# Altium PCB PCB1.PcbDoc (part 2 of 2)
Units mm, origin at the board's own origin, x right, y up, seen from the top; angles counter-clockwise.
Board outline 60.46 x 18.59 mm, 2 copper layers (Top Layer, Bottom Layer), stack 0.325 mm thick; 73 components, 89 nets, 327 pads, 208 vias.
Unrouted connection lines stored in the file: 2.
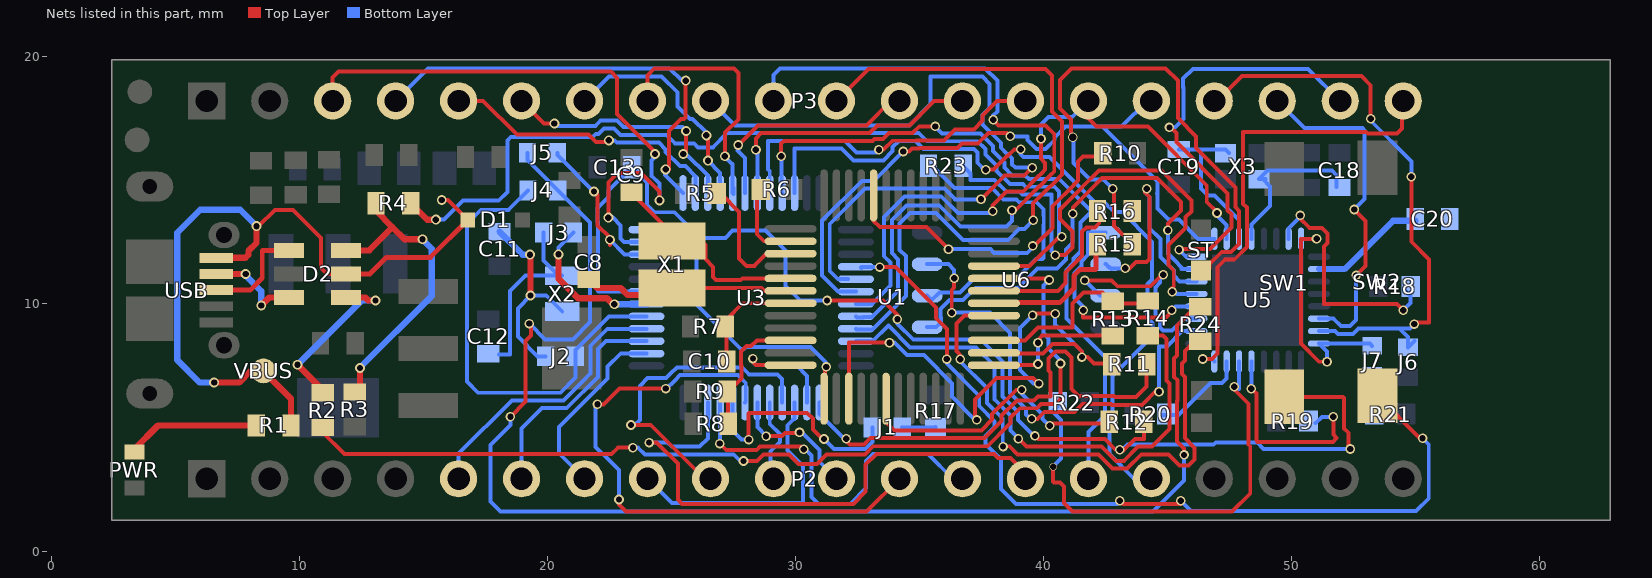
[diagram p2: the nets of this part, all layers, seen from the top]

## Via types
v1: diameter 0.385, hole 0.254, Top Layer to Bottom Layer, 122 vias
v2: diameter 0.4, hole 0.254, Top Layer to Bottom Layer, 75 vias
v3: diameter 0.5, hole 0.2, Top Layer to Bottom Layer, 9 vias
v4: diameter 0.385, hole 0.3, Top Layer to Bottom Layer, 1 vias
v5: diameter 0.3, hole 0.254, Top Layer to Bottom Layer, 1 vias

## Nets (pads, with @x,y where several pads share a name; then routed paths per layer and width w, separated by ;. In a path a pad name is that pad's centre, name@x,y a point inside that pad or via, vN(x,y) a via of type N, cw(c..) or ccw(c..) an arc to the next point about the centre after c; other vN are vias at no path point) (continued)
"LED STLINK": R15.2 U1.30 | length 5.7
  Top Layer w0.2: U1.30@38,10.03 38.025,10.055 40.654,10.055 41.225,10.626 41.225,11.134 41.486,11.395 42.106,11.395 42.112,11.401 42.112,12.002 R15.2@42.22,12.11
LNA: C20.2
MCO: J4.1 J5.1 R24.1 | length 55.2
  Top Layer w0.16: v1(18.5,5.45) 19.11,6.06 19.11,8.5 19.33,8.72 19.33,9.14 v1(19.26,9.21) ; v1(45.67,3.91) 45.67,4.18 45.388,4.462 45.388,6.096 45.397,6.105 45.397,6.925 45.273,7.049 45.273,7.8 45.388,7.915 45.388,9.128 46.15,9.89 R24.1@46.33,9.89
  Bottom Layer w0.16: v1(18.5,5.45) 18.5,5.12 17.69,4.31 17.69,2.03 18.091,1.629 44.418,1.629 45.67,2.881 v1(45.67,3.91) ; J5.1@19.19,16.1 19.19,15.8 J4.1@20.41,14.58 20.418,14.58 21.706,13.292 21.706,13.172 21.718,13.159 21.718,9.272 21.016,8.57 19.9,8.57 v1(19.26,9.21)
NetC8_2: C8.2 U1.6 X1.1 | length 8.6
  Top Layer w0.16: X1.1@25.39,10.65 28.628,10.65 28.748,10.53 U1.6@29.8,10.53
  Top Layer w0.254: C8.2@21.66,10.99 22.009,10.641 22.839,10.641 22.844,10.646 22.946,10.646 23.232,10.36 25.1,10.36 X1.1@25.39,10.65
NetC9_2: C9.2 U1.5 X1.2 | length 8.5
  Top Layer w0.16: C9.2@23.38,14.51 23.38,14.478 25.09,12.768 X1.2@25.09,12.54 ; X1.2@25.295,12.55 26.212,12.55 26.374,12.388 26.36,12.374 26.36,11.812 26.672,11.5 26.672,11.088 26.798,10.962 27.79,10.962 27.858,11.03 U1.5@29.8,11.03
NetC11_2: C11.2 J2.1 X2.1 | length 8.2
  Top Layer w0.254: v2(19.29,11.99) 19.31,12.01 v2(19.31,10.34)
  Bottom Layer w0.16: J2.1@19.92,7.89 19.6,7.89 18.796,8.694 18.796,9.826 v2(19.31,10.34) 19.945,10.34 X2.1@20.59,9.695
  Bottom Layer w0.254: C11.2@18.06,12.92 18.99,11.99 v2(19.29,11.99)
NetC12_2: C12.2 J3.1 X2.2 | length 7.4
  Bottom Layer w0.16: C12.2@18.04,7.96 18.484,7.96 18.484,10.524 19.105,11.145 X2.2@20.445,11.145 ; J3.1@19.84,12.88 19.84,11.75 X2.2@20.445,11.145 ; X2.2@20.59,11.145 X2.2@20.445,11.145
NetC13_2: C13.2 R12.2 SW1.1 U3.7 | length 51
  Top Layer w0.16: v1(31.27,10.14) 33.524,10.14 34.11,9.554 v1(34.11,9.39) ; v1(39.655,4.676) 39.775,4.556 42.475,4.556 42.911,4.12 v1(43.08,4.12) 43.189,4.12 43.219,4.09 43.691,4.562 44.05,4.562 R12.2@44.05,5.41 ; SW1.1@49.68,6.245 52.085,6.245 52.126,6.204 52.126,4.98 52.3,4.806 52.3,4.22 v1(52.37,4.15)
  Bottom Layer w0.16: U3.7@23.985,10.5 22.06,10.5 22.03,10.53 22.03,13.288 22.018,13.301 22.018,13.868 22.46,14.31 22.46,14.58 C13.2@23.4,15.52 24.011,14.909 24.011,14 24.311,13.7 25.12,13.7 26.16,12.66 27.167,12.66 27.464,12.957 28.794,12.957 29.602,12.149 29.602,10.728 30.19,10.14 v1(31.27,10.14) ; v1(34.11,9.39) 34.11,9.198 34.75,8.558 37.472,8.558 38.346,7.684 38.346,6.272 38.981,5.637 38.981,5.318 39.623,4.676 v1(39.655,4.676) ; v1(43.08,4.12) 43.104,4.12 43.134,4.09 43.379,4.335 45.846,4.335 45.851,4.33 46.859,4.33 46.951,4.422 48.607,4.422 48.879,4.15 v1(52.37,4.15)
NetC18_2: C18.2 U5.28 X3.1 | length 6.9
  Bottom Layer w0.16: U5.28@48.39,12.63 48.39,13.2 49.14,13.95 49.14,14.74 X3.1@48.845,15.035 ; X3.1@48.835,15.045 X3.1@48.845,15.035 ; X3.1@48.955,15.035 X3.1@48.845,15.035 ; C18.2@51.81,14.72 51.81,15.2 51.63,15.38 49.04,15.38 X3.1@48.695,15.035 X3.1@48.845,15.035
NetC19_2: C19.2 U5.27 X3.3 | length 6.5
  Bottom Layer w0.16: C19.2@45.46,16.23 46.345,16.23 ; X3.3@47.485,16.095 47.35,16.23 46.345,16.23 ; U5.27@47.89,12.63 47.89,13.388 46.898,14.38 46.63,14.38 46.345,14.665 46.345,16.23
NetC20_1: C20.1 U5.2 | length 4.7
  Bottom Layer w0.25: U5.2@51.115,11.405 52.144,11.405 54.099,13.36 C20.1@55,13.36
NetD1_2: D1.2 D2.5 R1.1 USB.1 VBUS.1 | length 31.2
  Top Layer w0.16: v2(8.26,13.14) 8.34,13.14 8.995,13.795 9.725,13.795 10.86,12.66 10.86,11.46 11.11,11.21 D2.5@11.87,11.21 ; v2(15.73,14.19) 15.98,14.19 D1.2@16.78,13.39
  Top Layer w0.2: D2.5@11.87,11.21 12.83,11.21 13.5,11.88 15.27,11.88 D1.2@16.78,13.39
  Top Layer w0.254: v2(6.55,6.83) 7.55,6.83 8.02,7.3 VBUS.1@8.54,7.3 8.54,7.29 9.65,6.18 R1.1@9.65,5.1 ; USB.1@6.625,11.86 7.81,11.86 7.931,11.981 7.931,12.137 8.26,12.466 v2(8.26,13.14)
  Bottom Layer w0.254: v2(6.55,6.83) 5.97,6.83 5.06,7.74 5.06,12.87 5.99,13.8 7.6,13.8 v2(8.26,13.14)
NetD2_1: D2.1 USB.3 | length 4.3
  Top Layer w0.2: USB.3@6.625,10.56 8,10.56 8.49,11.05 8.49,12.16 D2.1@9.57,12.16
NetD2_3: D2.3 USB.2 | length 4
  Top Layer w0.254: USB.2@6.625,11.21 v2(7.82,11.21) ; v2(8.45,9.94) 8.77,10.26 D2.3@9.57,10.26
  Bottom Layer w0.254: v2(7.82,11.21) 7.82,11.15 8.45,10.52 v2(8.45,9.94)
NetD2_4: D2.4 R2.1 | length 7
  Top Layer w0.254: v2(9.91,7.55) 10.93,6.53 R2.1@10.93,6.42 ; D2.4@11.87,10.26 12.65,10.26 12.77,10.14 v2(13.06,10.14)
  Bottom Layer w0.254: v2(9.91,7.55) 12.5,10.14 v2(13.06,10.14)
NetD2_6: D2.6 R3.1 R4.1 | length 12.5
  Top Layer w0.254: D2.6@11.87,12.16 12.8,12.16 13.739,13.099 ; R3.1@12.22,6.45 12.43,6.66 v2(12.43,7.42) ; R4.1@13.08,14.06 13.08,13.758 13.739,13.099 ; v2(14.95,12.61) 14.228,12.61 13.739,13.099
  Bottom Layer w0.254: v2(12.43,7.42) 15.33,10.32 15.33,12.23 v2(14.95,12.61)
NetJ1_1: J1.1 U3.44 | length 9.7
  Top Layer w0.16: v1(28.11,4.53) 28.11,5.59 28.13,5.61 30.47,5.61 30.7,5.38 30.7,4.93 31.08,4.55 v2(31.15,4.55)
  Bottom Layer w0.16: U3.44@27.46,6.025 27.46,4.89 27.82,4.53 v1(28.11,4.53) ; v2@31.048,4.59 31.088,4.55 v2(31.15,4.55) 31.555,4.145 32.815,4.145 33.1,4.43 J1.1@33.1,5.02
NetJ1_2: J1.2 R17.1 | length 1.4
  Bottom Layer w0.16: J1.2@34.3,5.02 35.64,5.02 R17.1@35.65,5.03
NetJ2_2: J2.2 J4.2 U3.5 | length 18.7
  Bottom Layer w0.16: J4.2@19.21,14.58 18.43,13.8 17.32,13.8 16.74,13.22 16.74,6.87 17.19,6.42 20.513,6.42 21.12,7.027 J2.2@21.12,7.89 21.12,8.15 22.47,9.5 U3.5@23.985,9.5
NetJ3_2: J3.2 U3.6 | length 6.1
  Top Layer w0.254: v2(20.44,12) 20.44,11.015 21.226,10.229 22.396,10.229 22.635,9.99 v2(22.69,9.99)
  Bottom Layer w0.16: v2(20.44,12) 20.44,12.28 J3.2@21.04,12.88
  Bottom Layer w0.254: v2(22.69,9.99) 23.975,9.99 U3.6@23.985,10
NetJ5_2: J5.2 U3.10 | length 6.3
  Top Layer w0.16: v2(21.87,14.54) 22.019,14.391 22.019,13.661 22.018,13.659 22.018,13.174 22.51,12.681 v2(22.51,12.59) 22.51,12.388 22.52,12.378
  Bottom Layer w0.16: J5.2@20.39,16.1 20.39,16.002 21.852,14.54 v2(21.87,14.54) ; v2(22.51,12.59) 23.1,12 U3.10@23.985,12
NetJ6_2: J6.2 P3.17 U5.7 | length 23.9
  Top Layer w0.16: P3.17@46.89,17.67 P3.17@46.89,18.19 47,18.19 47.999,19.189 52.821,19.189 53.2,18.81 v1(53.2,17.47) ; v1(54.84,15.13) 54.84,12.51 55.558,11.792 55.558,9.257 v1@54.95,9.257
  Bottom Layer w0.16: U5.7@51.115,8.905 51.766,8.905 51.873,8.798 52.487,8.798 52.709,9.02 54.35,9.02 ; v1(53.2,17.47) 53.16,17.43 54.84,15.75 v1(54.84,15.13) ; v1(54.95,9.19) 54.78,9.02 54.35,9.02 ; J6.2@54.97,8.51 J6.2@54.71,8.25 54.71,8.66 54.35,9.02
NetJ7_1: J7.1 U5.8 U5.32 | length 9.9
  Top Layer w0.16: v2(51.02,12.63) 50.39,12.63 50.38,12.62 50.38,8.401 51.111,7.67 v2(51.44,7.67)
  Bottom Layer w0.16: U5.32@50.39,12.63 v2(51.02,12.63) ; v2(51.44,7.67) 51.44,8.08 U5.8@51.115,8.405 53.165,8.405 J7.1@53.26,8.31
NetJ7_2: J7.2 R21.1 | length 1.6
  Bottom Layer w0.16: J7.2@53.26,7.11 53.26,5.64 R21.1@53.34,5.56
NetP2_8: P2.8 U3.39 | length 11.1
  Bottom Layer w0.16: P2.8@24.03,2.95 25.012,1.968 30.308,1.968 30.308,3.464 29.68,4.092 29.68,5.108 29.942,5.37 29.96,5.37 U3.39@29.96,6.025
NetP2_9: P2.9 U3.40 | length 13.1
  Top Layer w0.16: v2(23.36,5.12) 24.16,5.12 26.33,2.95 P2.9@26.57,2.95
  Bottom Layer w0.16: v2(23.36,5.12) 23.51,5.12 23.718,5.328 23.718,6.698 24.035,7.015 24.784,7.015 24.981,7.212 24.983,7.212 25.213,7.442 27.85,7.442 28.132,7.16 29.27,7.16 29.46,6.97 U3.40@29.46,6.025
NetP2_10: P2.10 U3.41 | length 3.5
  Bottom Layer w0.16: U3.41@28.96,6.025 28.96,5.165 29.368,4.757 29.368,4.44 28.987,4.059 P2.10@28.987,3.073
  Bottom Layer w0.254: P2.10@28.987,3.073 P2.10@29.11,2.95
NetP2_11: P2.11 U3.42 | length 6.1
  Top Layer w0.16: v1@28.73,4.67 v1(28.81,4.67) 29.45,4.67 29.58,4.8 30.1,4.8 30.12,4.78 v1(30.16,4.82)
  Bottom Layer w0.16: U3.42@28.46,6.025 28.46,5.03 28.81,4.68 v1(28.81,4.67) ; v1@30.15,4.91 30.16,4.9 v1@30.16,4.828 ; v1(30.16,4.82) v1@30.16,4.828 ; v1@30.199,4.871 v1@30.201,4.87 ; P2.11@31.65,3.41 P2.11@31.65,2.95 30.964,3.636 30.964,4.107 v1@30.201,4.87 ; v1@30.16,4.828 v1@30.201,4.87
NetP2_12: P2.12 U3.43 | length 23.9
  Top Layer w0.16: v1(22.01,5.95) 22.261,5.95 22.901,6.59 v1(24.77,6.59) ; v2(22.88,2.11) 22.88,1.91 23.161,1.629 32.869,1.629 P2.12@34.19,2.95
  Bottom Layer w0.16: v1(22.01,5.95) 22.07,5.95 21.93,5.81 21.93,4.232 22.222,3.94 22.24,3.94 22.88,3.3 v2(22.88,2.11) ; v1(24.77,6.59) 24.8,6.59 25.11,6.9 25.112,6.9 25.342,7.13 27.67,7.13 27.992,6.808 27.992,6.057 U3.43@27.96,6.025
NetP2_13: P2.13 U3.45 | length 15.6
  Top Layer w0.16: v1(26.94,4.37) 27.205,4.105 28.435,4.105 28.574,4.244 30.226,4.244 v1(30.33,4.14)
  Bottom Layer w0.16: U3.45@26.96,6.025 26.96,4.39 v1(26.94,4.37) 26.99,4.37 v1@27.01,4.35 ; v1@30.3,4.14 v1(30.33,4.14) 30.4,4.14 30.652,3.888 30.652,2.208 30.919,1.941 32.211,1.941 32.84,2.57 32.84,3.66 33.13,3.95 35.34,3.95 36.34,2.95 P2.13@36.73,2.95
NetP2_14: P2.14 U3.46 | length 23.1
  Top Layer w0.16: v1(24.09,4.41) 24.4,4.41 25.25,3.56 25.25,2.12 25.429,1.941 32.331,1.941 32.83,2.44 32.83,3.52 33.26,3.95 38.001,3.95 38.172,3.779 38.671,3.779 39.27,3.18 P2.14@39.27,2.95
  Bottom Layer w0.16: v1(24.09,4.41) 24.84,4.41 25.006,4.244 26.124,4.244 26.46,4.58 U3.46@26.46,6.025
NetP2_15: P2.15 U3.21 | length 28.7
  Top Layer w0.16: v1(29.42,15.96) 29.42,16.47 29.53,16.58 30.388,16.58 30.389,16.581 31.627,16.581 31.628,16.58 33.112,16.58 33.184,16.652 33.535,16.652 33.778,16.896 34.726,16.896 34.99,17.16 v1(35.63,17.16)
  Bottom Layer w0.16: v1@29.31,15.96 v1(29.42,15.96) 29.44,15.94 29.44,14.495 U3.21@29.46,14.475 ; v1(35.63,17.16) 35.914,16.876 37.465,16.876 37.966,16.375 37.966,16.172 38.423,15.715 38.423,15.499 38.734,15.188 39.261,15.188 39.409,15.04 40.636,15.04 41.943,13.733 41.492,13.282 41.492,12.115 41.217,11.84 41.217,11.665 40.933,11.381 40.933,9.407 42.477,7.863 42.477,5.499 42.368,5.39 42.368,5.388 41.81,4.83 P2.15@41.81,2.95
NetP2_16: P2.16 U3.22 | length 31.2
  Top Layer w0.16: v1(37.67,15.42) 37.981,15.42 38.531,15.97 38.541,15.96 38.821,16.24 v1(39.08,16.24)
  Bottom Layer w0.16: U3.22@29.96,14.475 29.96,16.268 31.859,16.268 32.335,15.792 33.54,15.792 33.914,16.166 33.914,16.326 34.168,16.58 34.841,16.58 35.169,16.252 37.206,16.252 37.342,16.116 37.342,15.697 37.67,15.369 v1(37.67,15.42) ; v1(39.08,16.24) 39.08,16.04 39.195,15.925 40.245,15.925 42.078,14.092 42.468,14.092 42.854,13.706 43.187,13.706 44.385,12.508 44.385,10.984 44.203,10.802 44.203,9.422 44.392,9.233 44.392,8.703 42.789,7.1 42.789,5.37 42.68,5.261 42.68,5.259 42.655,5.234 42.655,3.944 43.649,2.95 P2.16@44.35,2.95
NetP3_18: P3.18 U5.6 | length 13.9
  Top Layer w0.16: v1(52.53,13.81) 52.99,13.35 52.99,11.53 v1(52.61,11.15)
  Bottom Layer w0.16: P3.18@49.43,18.19 50.53,17.09 52.863,17.09 52.95,17.002 52.95,14.23 v1(52.53,13.81) ; U5.6@51.115,9.405 51.707,9.405 52.002,9.11 52.358,9.11 52.61,9.362 v1(52.61,11.15)
NetP3_19: P3.19 U5.24 | length 17.8
  Top Layer w0.16: v1(45.08,17.12) 45.13,17.12 45.362,16.888 45.362,16.528 47.431,14.459 47.431,13.776 47.578,13.629 47.578,13.079 46.709,12.21 45.47,12.21 v1(45.47,12.19)
  Bottom Layer w0.16: v1(45.08,17.12) 45.31,17.12 45.644,17.454 45.644,18.726 45.63,18.74 45.63,19.091 46.023,19.484 50.676,19.484 P3.19@51.97,18.19 ; v1(45.47,12.19) 45.755,11.905 U5.24@46.165,11.905
NetP3_20: P3.20 U5.16 | length 18.6
  Top Layer w0.16: v1(46.43,7.78) 46.79,7.78 47.01,8 47.01,8.042 47.012,8.044 47.012,8.936 47.01,8.938 47.01,9.442 47.012,9.444 47.012,10.336 47.01,10.338 47.01,11.475 47.321,11.785 47.695,11.785 48.202,12.292 48.202,13.887 48.055,14.034 48.055,16.936 53.017,16.936 53.082,16.87 54.26,16.87 54.46,17.07 54.46,18.19 P3.20@54.51,18.19
  Bottom Layer w0.16: v1(46.43,7.78) 46.79,7.78 U5.16@46.89,7.68
NetPWR_1: PWR.1 R1.2 | length 5.4
  Top Layer w0.254: PWR.1@3.33,4.025 3.33,4.145 4.285,5.1 R1.2@8.25,5.1
NetR5_2: R5.2 U1.3 | length 5.5
  Top Layer w0.16: R5.2@26.82,14.45 26.988,14.45 27.725,13.713 27.725,11.834 28.021,11.538 28.352,11.538 28.34,11.55 28.82,12.03 U1.3@29.8,12.03
NetR6_2: R6.2 U1.2 | length 3.2
  Top Layer w0.16: R6.2@28.37,14.41 R6.2@28.4,14.38 ; R6.2@28.63,14.39 28.446,14.206 28.446,12.812 28.728,12.53 U1.2@29.8,12.53
NetR8_2: R8.2 R9.1 U1.10 | length 5.4
  Top Layer w0.16: R8.2@27.28,5.17 27.28,6.44 R9.1@27.25,6.47 27.29,6.47 27.82,7 27.82,7.512 27.807,7.524 27.807,8.087 28.02,8.3 28.211,8.3 28.441,8.53 U1.10@29.8,8.53
NetR10_2: R10.2 U1.44 | length 13.2
  Top Layer w0.16: U1.44@33.15,14.38 33.15,13.348 33.4,13.098 35.282,13.098 35.7,12.68 v1(36.17,12.21) ; v1(39.57,12.34) 39.626,12.34 40.357,13.071 40.357,13.941 41.223,14.807 41.223,14.817 41.394,14.988 41.394,15.744 41.6,15.95 R10.2@42.13,15.95
  Bottom Layer w0.16: v1(36.17,12.21) 37.86,12.21 38.01,12.06 39.346,12.06 39.58,12.294 39.57,12.304 v1(39.57,12.34)
NetR11_1: R11.1 U3.37 | length 19.6
  Top Layer w0.16: v1(32.04,4.57) 32.04,4.49 32.2,4.33 32.758,4.33 33.014,4.586 37.001,4.586 37.621,4.586 38.307,5.272 38.307,5.495 38.924,6.112 39.611,6.112 39.773,6.274 40.29,6.274 40.29,7.238 40.21,7.318 40.21,7.799 40.491,8.08 40.889,8.08 41.125,7.844 41.125,6.575 41.431,6.269 41.446,6.284 42.852,6.284 42.891,6.245 43.726,6.245 44.16,6.679 44.16,7.33 R11.1@44.43,7.6
  Bottom Layer w0.16: U3.37@30.96,6.025 30.96,5.57 31.96,4.57 v1(32.04,4.57)
NetR13_1: R13.1 U1.25 | length 6
  Top Layer w0.16: U1.25@38,7.53 39.73,7.53 v1(39.78,7.58) ; v1(39.78,8.44) 39.78,8.55 39.775,8.555 39.95,8.73 42.38,8.73 42.61,8.5 R13.1@42.8,8.5
  Bottom Layer w0.16: v1(39.78,7.58) v1(39.78,8.44)
NetR14_2: R14.2 U3.34 | length 21.4
  Top Layer w0.16: v1(38.99,4.57) 39.316,4.244 42.346,4.244 42.921,3.669 43.239,3.669 43.82,4.25 44.372,4.25 45.076,4.954 45.076,6.225 45.085,6.234 45.085,6.796 44.961,6.92 44.961,8.589 44.828,8.722 R14.2@44.203,8.722
  Bottom Layer w0.16: U3.34@32.435,8.5 33.114,8.5 33.74,9.127 34.621,8.246 37.284,8.246 38.034,7.496 38.034,6.143 38.669,5.508 38.669,4.891 v1(38.99,4.57)
NetR15_1: R15.1 ST.1 | length 23
  Top Layer w0.16: v4(41.18,16.73) 41.119,16.791 41.119,17.435 40.662,17.891 40.662,19.03 41.133,19.501 44.929,19.501 45.42,19.01 45.42,17.499 46.158,16.761 46.158,16.292 47.743,14.707 47.743,13.905 47.89,13.758 47.89,12.421 47.566,12.097 47.191,12.097 46.698,11.604 46.698,11.438 46.615,11.355 ST.1@46.36,11.355 ; v1(42.79,14.65) 42.85,14.59 42.85,13.14 R15.1@43.58,12.41
  Bottom Layer w0.16: v4(41.18,16.73) 41.22,16.73 41.22,15.692 41.884,15.028 42.412,15.028 v1(42.79,14.65) v1@42.79,14.63
NetR16_1: R16.1
NetR18_2: R18.2 U5.31 | length 9.9
  Top Layer w0.16: v1(50.36,13.57) 50.36,13.498 50.332,13.47 50.739,13.062 51.227,13.062 51.452,12.837 51.452,12.451 51.32,12.318 51.32,9.995 54.265,9.995 v1(54.51,9.75)
  Bottom Layer w0.16: U5.31@49.89,12.63 49.89,13.05 50.36,13.52 v1(50.36,13.57) ; v1(54.51,9.75) 54.8,10.04 54.8,10.33 R18.2@54.55,10.58
NetR19_2: R19.2 U5.13 | length 8.2
  Top Layer w0.16: v1@48.48,6.5 48.587,6.393 48.587,4.483 48.63,4.44 51.67,4.44 51.825,4.595 51.82,4.6 51.69,4.73 v1(51.69,5.45)
  Bottom Layer w0.16: v1(48.38,6.58) 48.38,6.59 48.39,6.6 U5.13@48.39,7.68 ; R19.2@50.97,5.19 51.23,5.45 v1(51.69,5.45)
NetR20_2: R20.2 U5.15 | length 3.9
  Bottom Layer w0.16: R20.2@44.81,5.53 45.45,5.53 46.73,6.81 47.2,6.81 47.39,7 U5.15@47.39,7.68
NetR22_2: R22.2 U5.14 | length 18.6
  Top Layer w0.16: v5(40.39,3.44) 40.39,2.836 40.431,2.795 40.664,2.795 40.828,2.631 40.828,1.972 41.171,1.629 47.609,1.629 48.34,2.36 48.34,4.261 48.275,4.326 48.275,5.975 47.69,6.56 v1(47.69,6.66)
  Bottom Layer w0.16: v5(40.39,3.44) 40.71,3.76 40.71,5.328 40.388,5.65 40.36,5.65 40.36,5.658 40.57,5.868 R22.2@40.57,6.02 ; v1(47.69,6.66) 47.81,6.66 47.89,6.58 U5.14@47.89,7.68
NetR23_1: R23.1 U6.6 | length 12.8
  Bottom Layer w0.16: U6.6@35.31,10.335 35.493,10.152 35.805,10.464 36.633,10.464 37.199,11.03 38.918,11.03 39.701,11.813 39.963,11.813 40.005,11.855 40.005,12.403 40.003,12.405 40.003,13.192 40.011,13.2 40.011,13.552 40.003,13.561 40.003,13.82 39.719,14.104 39.021,14.104 38.92,14.205 38.393,14.205 37.915,14.683 36.417,14.683 35.53,15.57 R23.1@35.36,15.57
NetR23_2: R23.2 U5.21 | length 21
  Top Layer w0.16: v1(40.48,11.97) 40.87,11.97 41.174,12.274 41.174,12.926 ; 41.174,12.926 40.669,13.431 40.669,13.812 41.535,14.678 41.535,14.688 42.234,15.387 44.752,15.387 45.962,14.177 45.962,13.735 45.728,13.501 45.728,13.07 45.045,12.387 45.045,11.566 45.255,11.356 45.255,10.705 v1@45.17,10.62
  Bottom Layer w0.16: R23.2@36.76,15.57 37.059,15.271 37.059,15.007 37.375,15.007 37.482,15.007 37.494,14.995 37.846,14.995 37.858,15.007 38.033,15.007 38.513,14.527 39.04,14.527 39.151,14.416 40.315,14.416 40.315,13.69 40.323,13.682 40.323,13.071 40.315,13.063 40.315,12.534 40.317,12.532 40.317,12.133 v1(40.48,11.97) ; v1(45.19,10.49) 45.19,10.54 45.17,10.56 45.2,10.59 45.385,10.405 U5.21@46.165,10.405
NetR24_2: R24.2 U1.29 | length 21.6
  Top Layer w0.16: v1@36.602,7.71 v1@36.64,7.748 ; v1(36.64,7.77) v1@36.64,7.748 ; U1.29@38,9.53 36.81,9.53 36.49,9.21 36.49,8.1 36.72,7.87 36.72,7.828 v1@36.64,7.748 ; v1(38.37,4.25) 38.382,4.262 38.629,4.262 38.959,3.932 42.217,3.932 42.792,3.357 43.368,3.357 43.943,3.932 45.047,3.932 45.494,3.485 45.846,3.485 46.095,3.734 46.095,4.196 45.7,4.591 45.7,5.967 45.709,5.975 45.709,7.055 45.585,7.178 45.585,7.603 45.7,7.718 45.7,8.11 46.08,8.49 R24.2@46.33,8.49
  Bottom Layer w0.16: v1(36.64,7.77) 36.64,7.731 36.619,7.71 37.722,6.607 37.722,6.013 38.357,5.378 38.357,4.263 v1(38.37,4.25)
NetSW2_1: SW2.1 U3.28 | length 35.6
  Top Layer w0.16: v1(33.4,11.49) 34.035,11.49 35.666,9.859 35.666,9.424 36.1,8.99 v1(36.1,7.778) ; v1(43.08,2.06) 43.199,1.941 45.54,1.941 v1(45.54,2.06) ; SW2.1@53.47,6.305 55.195,4.58 v1(55.29,4.58)
  Bottom Layer w0.16: U3.28@32.665,11.45 32.645,11.47 32.665,11.49 v1(33.4,11.49) ; v1(36.1,7.778) 36.1,7.6 37.41,6.29 37.41,5.884 38.03,5.264 38.03,5.04 37.665,4.675 37.665,4.354 38.194,3.825 38.205,3.825 38.288,3.742 38.288,2.543 38.89,1.941 42.961,1.941 v1(43.08,2.06) ; v1(45.54,2.06) 45.95,1.65 55.03,1.65 55.54,2.16 55.54,4.33 v1(55.29,4.58)
NetU5_18: U5.18 U6.7 | length 18.9
  Top Layer w0.16: v1(36.3,9.65) 36.3,10.56 36.4,10.66 v1(36.4,11.04) ; v1@39.55,5.35 v1(39.53,5.37) 39.752,5.37 40.032,5.65 41.253,5.65 41.575,5.972 42.723,5.972 42.762,5.933 43.977,5.933 44.589,6.544 44.66,6.544 v1(44.66,6.46)
  Bottom Layer w0.16: U6.7@35.31,11.605 36.165,11.605 36.4,11.37 v1(36.4,11.04) ; v1(36.3,9.65) 37.84,9.65 38.658,8.832 38.658,6.401 39.293,5.766 39.293,5.547 39.47,5.37 v1(39.53,5.37) ; v1(44.66,6.46) 44.66,8.29 44.98,8.29 45.595,8.905 U5.18@46.165,8.905
NetU5_19: U5.19 U6.3 | length 8.6
  Top Layer w0.16: v1(41.67,10.95) 42.75,10.95 42.985,10.715 44.323,10.715 44.788,11.18 v1(44.83,11.18)
  Bottom Layer w0.16: v1(41.67,10.95) 42.285,10.335 U6.3@42.51,10.335 ; v1(44.83,11.18) 44.704,11.054 44.704,10.862 44.515,10.673 44.515,9.594 44.704,9.405 44.704,9.056 44.83,8.93 45.179,8.93 45.654,9.405 U5.19@46.165,9.405
NetU5_20: U5.20 U6.1 | length 9.2
  Top Layer w0.16: v1(41.6,9.75) 41.6,9.46 44.936,9.46 v1@45.17,9.694
  Bottom Layer w0.16: v1@41.59,9.89 41.245,10.235 41.245,11.252 41.529,11.536 41.529,11.71 41.804,11.985 41.804,12.875 U6.1@42.51,12.875 ; v1@45.19,9.86 45.17,9.84 v1(45.17,9.75) 45.325,9.905 U5.20@46.165,9.905
NetU5_22: U5.22 U6.2 | length 10
  Top Layer w0.16: v1(43.3,11.44) 43.475,11.44 43.735,11.7 44.16,11.7 44.268,11.808 44.268,14.318 44.275,14.325 44.1,14.5 44.17,14.57 v1(44.17,14.65)
  Bottom Layer w0.16: U6.2@42.51,11.605 42.515,11.61 42.645,11.48 42.667,11.502 42.749,11.42 42.769,11.44 v1(43.3,11.44) ; v1(44.17,14.65) 44.17,14.575 44.1,14.505 44.28,14.325 44.28,13.055 44.717,12.617 44.717,11.894 45.26,11.351 45.26,11.14 45.495,10.905 U5.22@46.165,10.905
NetU5_23: U5.23 U6.5 | length 18.3
  Top Layer w0.16: v1(41.18,13.64) 41.192,13.64 41.192,13.894 41.847,14.549 41.847,14.559 42.363,15.075 44.583,15.075 45.54,14.118 45.54,13.762 45.02,13.242 v1(45.02,12.97)
  Bottom Layer w0.16: U6.5@35.31,9.065 35.675,9.065 35.858,9.248 35.858,9.451 35.855,9.454 35.855,9.806 36.201,10.152 36.762,10.152 37.26,10.65 38.979,10.65 39.759,11.43 40.541,11.43 40.905,11.794 40.905,12.199 41.18,12.474 v1(41.18,13.64) ; v1(45.02,12.97) 45.029,12.961 45.029,12.03 45.304,11.755 45.304,11.748 45.572,11.48 45.572,11.405 U5.23@46.165,11.405
PA1: P3.3 U3.11 | length 25.1
  Top Layer w0.16: P3.3@11.33,18.19 11.33,19.13 11.57,19.37 22.55,19.37 22.8,19.12 22.8,17.66 24.37,16.09 v2(24.33,16.05) ; v2(22.45,13.48) 22.45,14.91 22.82,15.28 23.76,15.28 24.51,14.53 v2(24.51,14.18)
  Bottom Layer w0.16: v2(22.45,13.48) 22.63,13.48 22.942,13.168 22.942,12.642 23.085,12.5 U3.11@23.985,12.5 ; v2@24.25,15.93 24.33,16.01 v2(24.33,16.05) 24.33,15.93 24.19,15.79 24.19,15.171 24.51,14.851 v2(24.51,14.18)
PA3: P3.4 U3.13 | length 18
  Top Layer w0.16: v2(24.76,15.43) 24.89,15.43 24.9,15.42 24.9,16.973 25.387,17.46 25.511,17.46 25.57,17.519 v2(25.57,19.01) v2@25.46,19.01
  Bottom Layer w0.16: P3.4@13.87,18.19 15.181,19.501 24.921,19.501 25.412,19.01 v2(25.57,19.01) ; v2(24.76,15.43) 24.765,15.43 24.86,15.335 24.73,15.205 U3.13@25.46,14.475
PA4: P3.5 U3.14 | length 11.6
  Top Layer w0.16: P3.5@16.41,18.19 17.399,18.19 18.759,16.83 21.64,16.83 21.945,16.525 22.395,16.525 v2(22.47,16.6)
  Bottom Layer w0.16: P3.5@16.41,18.17 P3.5@16.41,18.19 ; v2(22.47,16.6) 22.708,16.6 22.802,16.506 24.485,16.506 24.762,16.229 24.762,16.128 25.332,15.558 25.552,15.558 25.96,15.15 U3.14@25.96,14.475
PA5: P3.6 U3.15 | length 10.5
  Top Layer w0.16: P3.6@18.95,18.19 19.76,17.38 19.862,17.278 v2(20.27,17.278) ; v2(25.47,16.05) 25.54,16.05 25.586,16.004 v2(25.586,16.98)
  Bottom Layer w0.16: v2(20.27,17.278) 20.376,17.172 21.922,17.172 22.142,17.392 22.798,17.392 23.06,17.13 25.436,17.13 v2(25.586,16.98) ; v2(25.47,16.05) 25.588,16.05 26.46,15.179 U3.15@26.46,14.475
PA6: P3.7 U3.16 | length 9.3
  Top Layer w0.16: v2(26.4,16.8) 26.44,16.8 26.47,16.83 v2(26.47,15.78)
  Bottom Layer w0.16: P3.7@21.49,18.19 22.472,19.172 24.598,19.172 25.23,18.54 25.23,17.97 25.74,17.46 25.849,17.46 26.4,16.909 v2(26.4,16.8) ; v2(26.47,15.78) 26.96,15.29 U3.16@26.96,14.475
PA7: P3.8 U3.17 | length 10.4
  Top Layer w0.16: P3.8@24.03,18.19 24.03,19.219 24.301,19.49 27.52,19.49 27.69,19.32 27.69,17.449 27.15,16.909 v2(27.15,15.96)
  Bottom Layer w0.16: v2(27.15,15.96) 27.15,15.93 27.44,15.64 27.46,15.64 U3.17@27.46,14.475 27.49,14.445 U3.17@27.49,14.68
PA8: P3.9 U3.29 | length 30.3
  Top Layer w0.16: v1(37.48,14.22) 37.656,14.396 37.66,14.396 38.437,15.173 39.213,15.173 39.54,15.5 v1(39.55,15.5)
  Bottom Layer w0.16: P3.9@26.57,18.15 P3.9@26.57,18.19 27.556,17.204 28.048,17.204 ; 28.049,17.204 34.593,17.204 35.45,18.061 35.45,19.172 37.537,19.172 37.828,18.881 37.828,17.899 37.545,17.616 37.545,17.237 38.278,16.504 38.278,16.301 38.534,16.045 38.568,16.045 38.735,15.878 38.735,15.628 38.863,15.5 v1(39.55,15.5) ; U3.29@32.12,11 31.702,11 31.38,11.322 31.38,13.23 32.802,14.652 36.007,14.652 36.389,14.27 36.439,14.22 v1(37.48,14.22)
PA9: P3.16 U3.30 U5.25 | length 26.8
  Top Layer w0.16: v1(34.339,16.15) 34.58,16.15 34.702,16.272 34.984,16.272 34.998,16.286 36.525,16.286 36.709,16.47 37.35,16.47 37.775,16.895 38.525,16.895 v1(38.66,16.76)
  Bottom Layer w0.16: U3.30@32.435,10.5 31.71,10.5 31.068,11.142 31.068,13.359 32.673,14.964 33.153,14.964 v1(34.339,16.15) ; v1(38.66,16.76) 39.361,16.76 39.361,16.608 39.724,16.245 40.076,16.245 40.455,16.624 40.455,16.715 40.895,17.155 42.375,17.155 42.38,17.15 ; P3.16@44.35,18.19 44.19,18.19 43.15,17.15 42.38,17.15 ; U5.25@46.89,12.63 46.23,12.63 45.46,13.4 45.042,13.4 44.592,13.85 44.592,14.454 44.584,14.463 44.595,14.474 44.595,14.935 42.38,17.15
PA10: P3.15 U3.31 U5.26 | length 25.9
  Top Layer w0.16: v1(37.95,13.74) 37.95,13.98 38.513,14.543 39.184,14.543 39.716,15.075 39.726,15.075 39.975,15.324 39.975,15.334 40.068,15.427 40.068,15.693 39.9,15.861 v1(39.9,16.67) ; P3.15@41.81,18.19 41.81,17.478 42.138,17.15 44.22,17.15 46.586,14.784 46.586,14.115 47,13.701 v1(47,13.67)
  Bottom Layer w0.16: U3.31@32.435,10 33.08,10 33.825,10.745 33.825,11.672 33.571,11.926 33.571,13.512 34.399,14.34 35.878,14.34 36.546,13.672 v1@38,13.672 ; v1(39.9,16.67) 39.9,17.241 40.199,17.54 41.16,17.54 P3.15@41.81,18.19 ; v1(47,13.67) 47,13.57 47.39,13.18 U5.26@47.39,12.63
PA11: P3.10 U3.32 | length 30
  Top Layer w0.16: v1(37.97,17.43) 38.192,17.208 40.088,17.208 40.435,16.861 40.435,15.353 40.287,15.205 40.287,15.195 39.855,14.763 39.845,14.763 38.74,13.658 38.73,13.668 v1(38.73,13.78)
  Bottom Layer w0.16: P3.10@29.11,18.19 29.11,19.23 29.381,19.501 37.649,19.501 38.14,19.01 38.14,17.77 37.97,17.6 v1(37.97,17.43) v1@37.97,17.35 ; U3.32@32.435,9.5 32.485,9.45 32.741,9.45 32.741,9.483 33.093,9.483 34.137,10.527 34.137,11.801 33.883,12.055 33.883,13.383 34.48,13.98 35.796,13.98 36.656,13.12 38.51,13.12 38.73,13.34 v1(38.73,13.78)
PA12: P3.11 U3.33 | length 27.8
  Top Layer w0.16: P3.11@31.65,18.19 32.94,19.48 40.08,19.48 40.35,19.21 40.35,17.762 40.747,17.365 40.747,15.224 40.599,15.076 40.599,15.066 39.984,14.451 39.974,14.451 39.586,14.063 v1(39.586,13.376)
  Bottom Layer w0.16: U3.33@32.435,9 32.456,8.979 33.098,8.979 34.449,10.33 34.449,11.93 34.195,12.184 34.195,13.241 34.622,13.668 35.667,13.668 36.755,12.58 38.58,12.58 39.02,13.02 39.23,13.02 v1(39.586,13.376)
PB0: P3.12 U3.18 | length 9.3
  Top Layer w0.16: v2(27.69,16.41) 28.485,17.205 31.885,17.205 31.886,17.204 32.853,17.204 33.839,18.19 P3.12@34.19,18.19
  Bottom Layer w0.16: v2(27.69,16.41) 27.69,16.23 27.65,16.19 27.96,15.88 U3.18@27.96,14.475
PB1: P3.13 U3.19 | length 11.4
  Top Layer w0.16: v2(28.4,16.22) 28.4,16.679 28.614,16.893 31.756,16.893 31.757,16.892 32.983,16.892 33.299,17.208 34.597,17.208 35.579,18.19 P3.13@36.73,18.19
  Bottom Layer w0.16: v2(28.4,16.22) 28.34,16.22 28.46,16.1 U3.19@28.46,14.475 U3.19@28.52,14.535
PB2: P3.14 U3.20 | length 13.7
  Top Layer w0.16: v1(33.362,16.222) 33.546,16.222 33.908,16.584 34.855,16.584 34.869,16.598 35.992,16.598 36.436,17.042 37.191,17.042 37.545,17.396 37.545,17.606 38.129,18.19 P3.14@39.27,18.19
  Bottom Layer w0.16: U3.20@28.96,14.475 28.96,15.36 28.89,15.43 28.89,16.58 31.988,16.58 32.464,16.104 33.244,16.104 v1(33.362,16.222)
PC13: P2.7 U3.2 | length 7.5
  Bottom Layer w0.16: P2.7@21.49,2.95 20.46,3.98 20.46,5.04 22.42,7 22.42,7.47 22.95,8 U3.2@23.985,8
PC14: P2.6 U3.3 | length 9.2
  Bottom Layer w0.16: P2.6@18.95,2.95 18.95,4.97 19.776,5.796 20.772,5.796 22.032,7.056 22.032,8.18 22.352,8.5 U3.3@23.985,8.5
PC15: P2.5 U3.4 | length 11.3
  Bottom Layer w0.16: P2.5@16.41,2.95 16.41,3.961 18.557,6.108 20.642,6.108 21.432,6.898 21.432,6.902 21.72,7.19 21.72,8.309 22.411,9 U3.4@23.985,9
RST: C10.2 R7.2 U1.7 | length 4.5
  Top Layer w0.16: C10.2@27.22,7.78 27.22,9.15 27.19,9.18 27.22,9.18 27.22,9.382 27.868,10.03 U1.7@29.8,10.03
"STLINK RX": U1.13 U3.12 | length 13.6
  Top Layer w0.16: U1.13@31.15,5.24 U1.13@31.15,6.18 31.21,6.24 31.195,6.255 31.195,7.415 v1(31.24,7.46)
  Bottom Layer w0.16: U3.12@23.985,13 U3.12@24.284,13 ; U3.12@24.6,13 U3.12@24.284,13 ; v1(31.24,7.46) 31.27,7.49 31.27,7.58 31.2,7.65 31.21,7.66 30.597,8.272 28.004,8.272 27.912,8.18 27.789,8.18 25.996,9.973 25.996,11.941 24.979,12.958 24.242,12.958 U3.12@24.284,13
"STLINK TX": U1.12 U3.38 | length 5.5
  Top Layer w0.16: v1(28.28,7.8) 28.27,7.8 28.2,7.73 28.4,7.53 U1.12@29.8,7.53
  Bottom Layer w0.16: v1(28.28,7.8) 28.27,7.8 28.2,7.73 28.4,7.53 30.03,7.53 30.46,7.1 U3.38@30.46,6.025
"T JTCK": R11.2 U1.15 U1.26 | length 24.7
  Top Layer w0.16: U1.15@32.15,6.18 32.15,8.44 v1(33.79,8.44) v1@33.9,8.44 ; v1(37.306,5.323) 37.24,5.389 37.24,6.148 37.71,6.618 38.112,7.02 39.58,7.02 v1(39.81,6.79) ; U1.26@38,8.03 38.02,8.01 39.98,8.01 40.362,8.392 41.248,8.392 41.55,8.09 v1(41.55,7.86) 41.78,7.86 42.04,7.6 R11.2@42.72,7.6 ; v1(39.56,9.54) 39.63,9.61 v1(40.47,9.61)
  Bottom Layer w0.16: v1(33.79,8.44) 33.986,8.44 34.492,7.934 35.174,7.934 36.307,6.801 36.307,6.263 37.247,5.323 v1(37.306,5.323) ; v1@37.3,5.44 v1@37.31,5.43 ; v1(39.56,9.54) 39.06,9.04 39.06,7.33 39.6,6.79 v1@39.65,6.79 ; v1(40.47,9.61) 40.47,9.17 40.93,8.71 41.55,8.09 v1(41.55,7.86)
"T JTMS": R13.2 R14.1 U1.27 | length 7.8
  Top Layer w0.16: U1.27@38,8.53 39.254,8.53 39.784,9.06 41.17,9.06 41.17,9.349 41.168,9.352 41.168,10.028 41.61,10.47 42.375,10.47 42.835,10.01 R14.1@44.24,10.01
"T NRST": R12.1 U1.18 | length 11.8
  Top Layer w0.16: U1.18@33.65,6.18 33.65,5.24 33.992,4.898 37.13,4.898 37.491,4.898 37.932,5.339 37.932,5.561 38.911,6.54 v1(39.12,6.54) v1@39.13,6.54 ; v1(40.25,5.09) 40.25,5.12 40.3,5.17 R12.1@42.68,5.17
  Bottom Layer w0.16: v1(39.12,6.54) 39.12,6.388 39.963,5.545 39.963,5.365 40.238,5.09 v1(40.25,5.09)
"T SWO": R16.2 U1.31 | length 6.8
  Top Layer w0.16: U1.31@38,10.53 40.581,10.53 40.893,10.842 40.893,11.272 41.558,11.937 41.558,12.916 41.734,13.092 42.072,13.092 42.25,13.27 R16.2@42.25,13.82
USB_DM: R2.2 U1.32 | length 39.6
  Top Layer w0.16: R2.2@10.93,5.02 10.93,4.82 11.81,3.94 22.578,3.94 22.84,4.202 v1(23.442,4.202) ; v2(27.9,3.67) 28.441,3.67 28.703,3.932 29.728,3.932 30.11,3.55 30.861,3.55 31.243,3.932 32.801,3.932 33.131,4.262 37.738,4.262 38.669,5.193 38.669,5.416 39.048,5.795 39.735,5.795 39.903,5.962 40.512,5.962 40.69,6.14 v2(40.69,7.6) ; U1.32@38,11.03 v2@40.29,11.03
  Bottom Layer w0.16: v1(23.442,4.202) 23.654,4.202 23.924,3.932 27.508,3.932 27.77,3.67 v2(27.9,3.67) ; v2(40.23,10.97) 40,10.74 40,8.821 40.205,8.616 40.205,8.205 40.69,7.72 v2(40.69,7.6)
USB_DP: R4.2 U1.33 | length 36.1
  Top Layer w0.16: U1.33@38,11.53 39.439,11.53 40.659,12.75 40.699,12.71 v1(40.74,12.71)
  Top Layer w0.254: R4.2@14.48,14.06 15.14,13.4 v2(15.49,13.4)
  Bottom Layer w0.16: v2(15.49,13.4) 15.82,13.4 16.589,14.169 18.029,14.169 18.38,14.52 18.38,16.6 18.512,16.732 21.813,16.732 21.941,16.86 22.051,16.86 22.271,17.08 22.669,17.08 22.931,16.818 24.803,16.818 25.139,16.482 25.906,16.482 26.069,16.32 26.661,16.32 27.234,16.892 27.919,16.892 34.97,16.892 35.298,16.564 37.335,16.564 37.654,16.245 37.654,16.037 38.111,15.58 38.111,15.37 38.642,14.839 39.169,14.839 39.28,14.728 40.444,14.728 40.627,14.545 40.627,13.819 40.635,13.811 40.635,12.942 40.627,12.934 40.627,12.823 v1(40.74,12.71)
pads on no net: U1.4 U1.11 U1.14 U1.16 U1.17 U1.19 U1.20 U1.21 U1.22 U1.28 U1.34 U1.37 U1.38 U1.39 U1.40 U1.41 U1.42 U1.43 U1.45 U1.46 U3.25 U3.26 U3.27 U5.5 U5.9 U5.10 U5.12 USB.4 USB.6 USB.7 USB.8 USB.9 USB.10 USB.11
copper on no net:
  other v2: 54.18,12.7 54.03,13.88

## Polygon pours and split planes (outlines as drawn)
GND on Top Layer (solid, pour order 4): 2.41,19.86 2.42,19.87 56.86,19.87 56.86,1.22 56.81,1.27 2.41,1.27
GND on Bottom Layer (solid, pour order 6): 2.42,19.87 56.86,19.87 56.86,1.22 2.46,1.22 2.41,1.27

## Keep-outs
Keep-Out Layer:
  the board outline again, w0.254

## Other copper
Bottom Layer:
  rectangle net LNA: 57.01,15.39 62.51,16.29
  region net LNA: 62.51,13.35 62.51,13.85 56.55,13.85 56.55,13.35
  rectangle net LNA: 59.41,6.59 62.51,7.09
  rectangle net LNA: 59.41,8.79 62.51,9.29
  rectangle net LNA: 59.41,11.29 62.51,11.79
  rectangle net LNA: 59.41,4.09 62.51,4.59
  rectangle net LNA: 58.01,1.89 62.51,2.39
  rectangle net LNA: 62.01,11.29 62.51,16.29
  region net LNA: 59.91,4.09 59.91,7.09 59.41,7.09 59.41,4.09
  region net LNA: 62.51,6.59 62.51,9.29 62.01,9.29 62.01,6.59
  region net LNA: 62.51,1.89 62.51,4.59 62.01,4.59 62.01,1.89
  region net LNA: 59.91,8.79 59.91,11.79 59.41,11.79 59.41,8.79

## Silkscreen, mask and mechanical layers (free items; w line width, h text height)
Top Overlay:
  text "NeonLogic.io" at 62.38,1.8 h1.52 r90
Bottom Overlay:
  text "V 1.0" at 58.37,18.44 h1.52
  text "7/5/18" at 57.35,17.13 h0.9